# EAGLE board PCB_board (EAGLE 9.7.0)
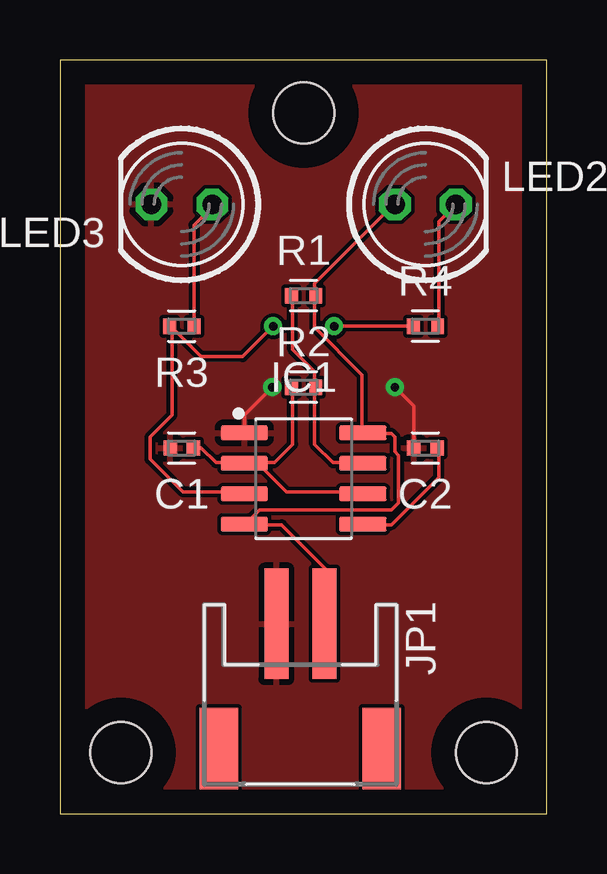
[diagram p0: board, top side]
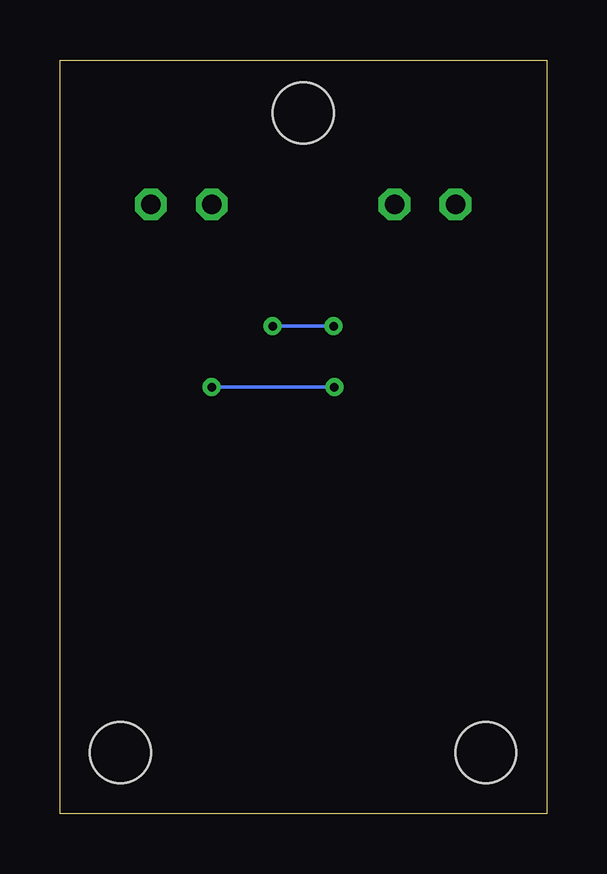
[diagram p1: board, bottom side, seen from below]

Size 20.3 x 31.42 mm. Coordinates in mm from the lower left corner, seen from the top.
Outline: 0,31.42 0,0 20.3,0 20.3,31.42 0,31.42
Copper layers (1*16): Top 0.035mm / dielectric 1.5mm / Bottom 0.035mm
Design rules "Fusion Electronics Design Rules": minimum track width 6mil, minimum drill 0.35mm, track to track 6mil, track to pad 6mil, pad to pad 6mil, via to via 6mil, smd to smd 6mil, copper to edge 40mil, drill to drill 6mil, minimum pad ring 10mil, minimum via ring 8mil, stop-mask expansion 4mil, vias tented up to drill 9999mil, thermal gap 10mil
Holes 2.54 mm at 10.16,29.21 17.78,2.54 2.54,2.54

## Footprints (pad centres in the part's own frame; a part is rotated, then mirrored left to right if it is on the bottom)
CAPC1005X60 = smd 0.56 x 0.629: 1 -0.485,0; 2 0.485,0
D0008A = smd 1.965 x 0.602: 1 -2.47,1.905; 2 -2.47,0.635; 3 -2.47,-0.635; 4 -2.47,-1.905; 5 2.47,-1.905; 6 2.47,-0.635; 7 2.47,0.635; 8 2.47,1.905
JSTPH2 = smd 1 x 4.6: 1 -1,-3.7; 2 1,-3.7 | smd 1.6 x 3.4: NC1 -3.4,1.5; NC2 3.4,1.5
LED5MM = drill 0.813 octagon: A -1.27,0; K 1.27,0
RESC1005X40 = smd 0.535 x 0.644: 1 -0.507,0; 2 0.507,0

## Placement (x,y rotation side)
C1  1u  [CAPC1005X60]  5.08,15.24 180 top
C2  10n  [CAPC1005X60]  15.24,15.24 180 top
IC1  IC-555  [D0008A]  10.16,13.97 0 top
JP1  JST-PH2  [JSTPH2]  10.02,4.22 180 top
LED2  [LED5MM]  15.24,25.4 0 top
LED3  [LED5MM]  5.08,25.4 180 top
R1  1k  [RESC1005X40]  10.16,21.59 0 top
R2  470k  [RESC1005X40]  10.16,17.78 0 top
R3  220k  [RESC1005X40]  5.08,20.32 180 top
R4  220k  [RESC1005X40]  15.24,20.32 0 top

## Library data of the parts
C1 C2 = Capacitor; CATEGORY: Capacitor; PACKAGE_SIZE: 0402; PACKAGE_TYPE: Surface Mount; SUBCATEGORY: Ceramic Capacitors; TYPE: MLCC
IC1 JP1 = Tutorial - Fusion 360
LED2 LED3 = AtoZ v7
R1-R4 = Tutorial - Fusion 360; CATEGORY: Resistor; SUB-CATEGORY: Fixed

## Nets
GND: C1.2 C2.2 IC1.1 JP1.2 LED3.K
N$1: IC1.7 R1.1 R2.2
N$2: C1.1 IC1.2 IC1.6 R2.1
N$3: C2.1 IC1.5
N$4: LED3.A R3.1
N$5: IC1.3 R3.2 R4.1
N$7: LED2.K R4.2
V+: IC1.4 IC1.8 JP1.1 LED2.A R1.2

## Tracks (layer width: path | path; a pad name or v marks a point on that pad's centre or on a via)
GND  (via drill 0.35)
  Top 0.152: C2.2 14.76,17 v13.97,17.78 | v8.85,17.78 7.69,16.62 IC1.1
  Bottom 0.152: v13.97,17.78 v8.85,17.78
  pour Top: 0.08,0.08 20.22,0.08 20.22,31.34 0.08,31.34
N$1
  Top 0.152: IC1.7 12.6,14.63 11.38,14.63 10.62,15.39 10.62,17.68 R2.2 10.62,17.83 10.62,18.44 9.7,19.36 9.7,21.49 R1.1
N$2
  Top 0.152: C1.1 5.89,15.24 6.5,14.63 7.57,14.63 IC1.2 | R2.1 9.7,17.68 9.7,15.39 8.94,14.63 7.72,14.63 IC1.2 | IC1.6 12.6,13.41 9.45,13.41 8.26,14.61 IC1.2
N$3
  Top 0.152: C2.1 15.8,15.24 15.8,14.02 13.82,12.04 12.75,12.04 IC1.5
N$4
  Top 0.152: R3.1 5.59,20.42 5.59,24.54 6.35,25.3 LED3.A
N$5  (via drill 0.35)
  Top 0.152: 4.67,20.27 4.67,16.61 3.76,15.7 3.76,14.78 5.13,13.41 7.57,13.41 IC1.3 | 4.67,20.27 R3.2 | 14.73,20.42 R4.1 v11.43,20.32 | v8.89,20.32 7.62,19.05 5.89,19.05 4.67,20.27
  Bottom 0.152: v11.43,20.32 v8.89,20.32
N$7
  Top 0.152: LED2.K 15.8,24.69 15.8,20.42 R4.2
V+
  Top 0.152: 7.72,12.04 9.25,12.04 11.07,10.21 11.07,7.92 JP1.1 | 7.72,12.04 IC1.4 | LED2.A 13.97,25.45 10.62,22.1 10.62,21.64 R1.2 10.62,21.49 10.62,20.27 12.6,18.29 12.6,16 IC1.8 12.75,15.85 13.82,15.85 13.97,15.7 13.97,15.09 14.12,14.94 14.12,12.95 13.82,12.65 8.33,12.65 7.72,12.04